# EAGLE board PDU-breakout (EAGLE 9.7.0)
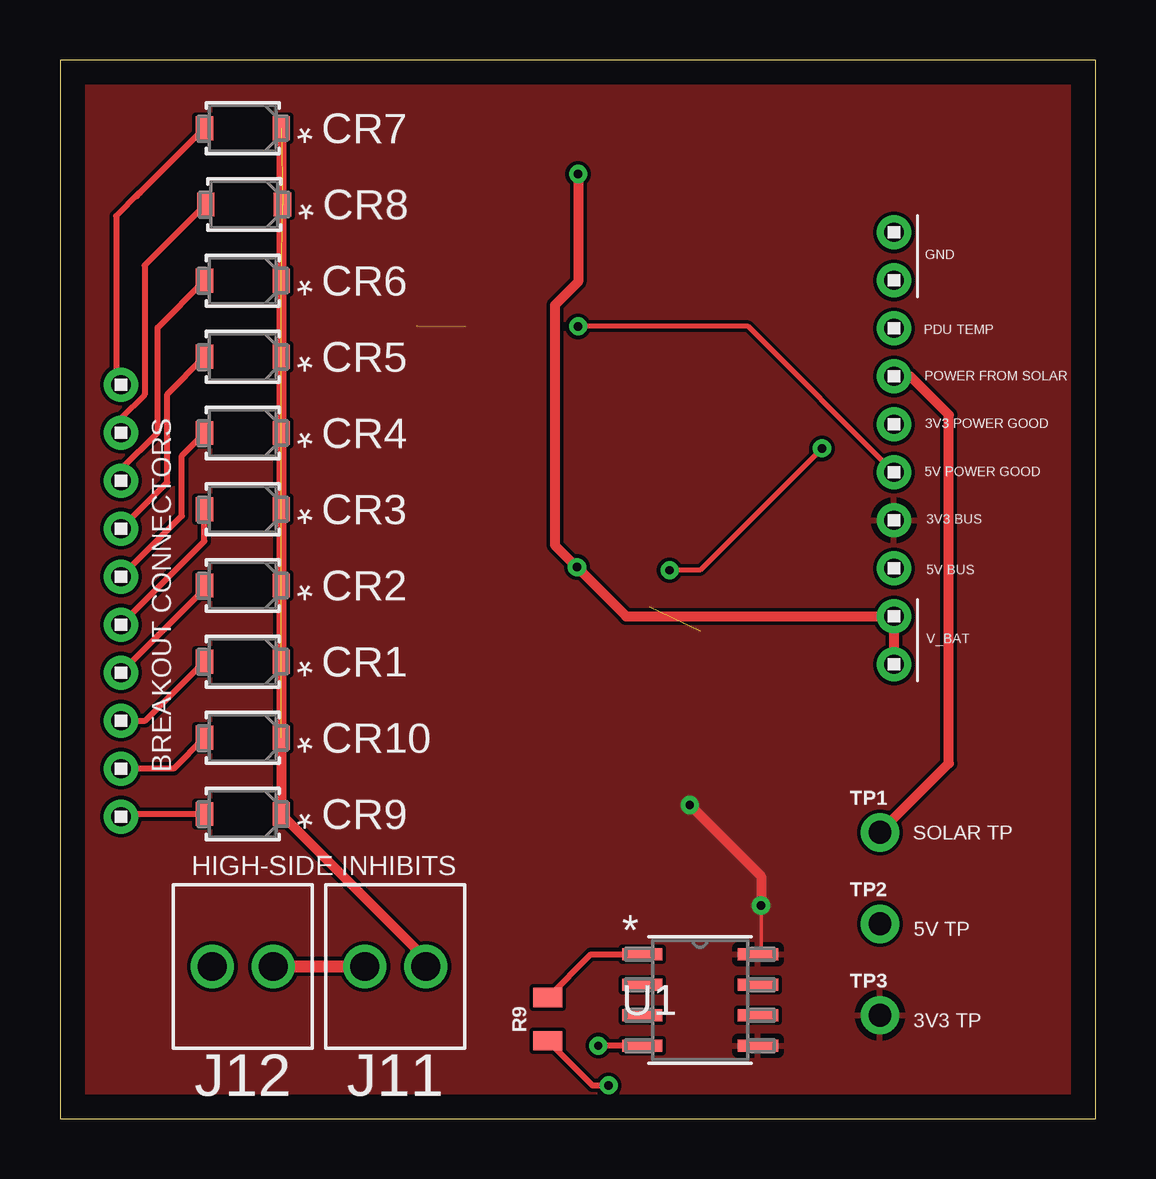
[diagram p0: board, top side]
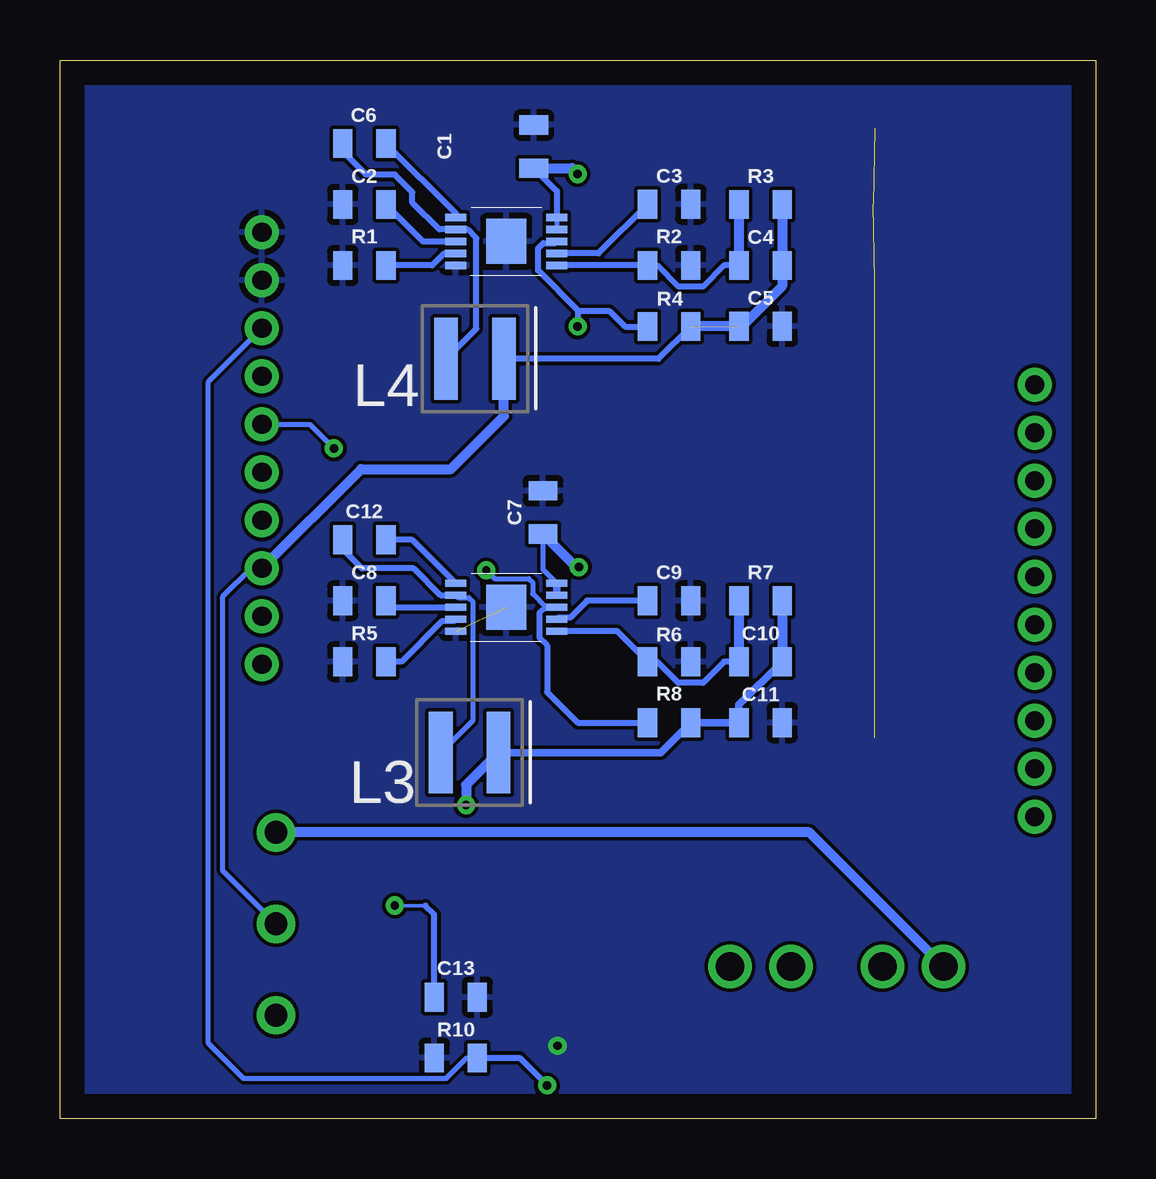
[diagram p1: board, bottom side, seen from below]

Size 43.16 x 44.12 mm. Coordinates in mm from the lower left corner, seen from the top.
Outline: 0,0 43.16,0 43.16,44.12 0,44.12 0,0
Copper layers (1*16): Top 0.035mm / dielectric 1.5mm / Bottom 0.035mm
Design rules "default": minimum track width 6mil, minimum drill 0.35mm, track to track 6mil, track to pad 6mil, pad to pad 6mil, via to via 6mil, smd to smd 6mil, copper to edge 40mil, drill to drill 6mil, minimum pad ring 10mil, minimum via ring 8mil, stop-mask expansion 4mil, vias tented up to drill 0mil, thermal gap 10mil

## Footprints (pad centres in the part's own frame; a part is rotated, then mirrored left to right if it is on the bottom)
0805 = smd 0.8 x 1.2: 1 -0.9,0; 2 0.9,0
CFP3_SOD123W_NEX-L = smd 0.711 x 0.991: 1 -1.6,0; 2 1.6,0
TERMBLK_254-2N = drill 1.2: 1 0,0; 2 2.54,0
XFL4020 = smd 0.98 x 3.4: P$1 1,1.8; P$2 3.4,1.8
1X01_NO_SILK = drill 0.95 pad 1.6: 1 0,0
R_8_ADI-L = smd 1.676 x 0.508: 1 -2.413,1.905; 2 -2.413,0.635; 3 -2.413,-0.635; 4 -2.413,-1.905; 5 2.413,-1.905; 6 2.413,-0.635; 7 2.413,0.635; 8 2.413,1.905
LT8609A-MSE10 = smd 0.889 x 0.3: BST 0,2; EN/UV 4.211,2; FB 4.211,0; INTVCC 0,1; PG 4.211,1; RT 0,0.5; SW 0,1.5; SYNC 0,0; TR/SS 4.211,0.5; VIN 4.211,1.5 | smd 1.68 x 1.88: GND 2.106,1
1X10 = drill 0.8 pad 1.422: 1 -9,0; 2 -7,0; 3 -5,0; 4 -3,0; 5 -1,0; 6 1,0; 7 3,0; 8 5,0; 9 7,0; 10 9,0

## Placement (x,y rotation side)
C1  4.7uF  [0805]  23.42,40.51 90 bottom
C2  1uF  [0805]  30.48,38.1 0 bottom
C3  10nF  [0805]  17.78,38.11 0 bottom
C4  10pF  [0805]  13.97,35.56 0 bottom
C5  22uF  [0805]  13.97,33.02 0 bottom
C6  0.1uF  [0805]  30.48,40.64 180 bottom
C7  4.7uF  [0805]  23.04,25.27 90 bottom
C8  1uF  [0805]  30.48,21.59 0 bottom
C9  10nF  [0805]  17.78,21.59 0 bottom
C10  10pF  [0805]  13.97,19.05 0 bottom
C11  22uF  [0805]  13.97,16.51 0 bottom
C12  0.1uF  [0805]  30.48,24.13 180 bottom
C13  0.1uF  [0805]  26.67,5.07 180 bottom
CR1  PMEG10020ELRXCFP3_SOD123W_NEX-L  [CFP3_SOD123W_NEX-L]  7.62,19.05 180 top
CR2  PMEG10020ELRXCFP3_SOD123W_NEX-L  [CFP3_SOD123W_NEX-L]  7.62,22.23 180 top
CR3  PMEG10020ELRXCFP3_SOD123W_NEX-L  [CFP3_SOD123W_NEX-L]  7.62,25.4 180 top
CR4  PMEG10020ELRXCFP3_SOD123W_NEX-L  [CFP3_SOD123W_NEX-L]  7.62,28.57 180 top
CR5  PMEG10020ELRXCFP3_SOD123W_NEX-L  [CFP3_SOD123W_NEX-L]  7.62,31.75 180 top
CR6  PMEG10020ELRXCFP3_SOD123W_NEX-L  [CFP3_SOD123W_NEX-L]  7.62,34.92 180 top
CR7  PMEG10020ELRXCFP3_SOD123W_NEX-L  [CFP3_SOD123W_NEX-L]  7.62,41.27 180 top
CR8  PMEG10020ELRXCFP3_SOD123W_NEX-L  [CFP3_SOD123W_NEX-L]  7.67,38.1 180 top
CR9  PMEG10020ELRXCFP3_SOD123W_NEX-L  [CFP3_SOD123W_NEX-L]  7.62,12.7 180 top
CR10  PMEG10020ELRXCFP3_SOD123W_NEX-L  [CFP3_SOD123W_NEX-L]  7.62,15.88 180 top
J11  2828XX-2282834-2  [TERMBLK_254-2N]  12.7,6.35 0 top
J12  2828XX-2282834-2  [TERMBLK_254-2N]  6.35,6.35 0 top
L3  2.2uH  [XFL4020]  28.3,13.46 0 bottom
L4  2.2uH  [XFL4020]  28.07,29.87 0 bottom
R1  18.2k  [0805]  30.48,35.56 180 bottom
R2  187k  [0805]  17.78,35.56 180 bottom
R3  1M  [0805]  13.97,38.1 0 bottom
R4  100k  [0805]  17.78,33.01 180 bottom
R5  18.2k  [0805]  30.48,19.05 180 bottom
R6  309k  [0805]  17.78,19.05 180 bottom
R7  1M  [0805]  13.97,21.59 0 bottom
R8  100k  [0805]  17.78,16.51 180 bottom
R9  45.3k  [0805]  20.32,4.16 90 top
R10  10k  [0805]  26.67,2.54 0 bottom
TP1  TEST-POINTPOGO_PTH  [1X01_NO_SILK]  34.16,11.94 0 top
TP2  TEST-POINTPOGO_PTH  [1X01_NO_SILK]  34.16,8.13 0 top
TP3  TEST-POINTPOGO_PTH  [1X01_NO_SILK]  34.16,4.32 0 top
U1  TMP36FSZR_8_ADI-L  [R_8_ADI-L]  26.67,4.95 0 top
U$1  LT8609A-MSOP10  [LT8609A-MSE10]  26.67,35.56 0 bottom
U$2  LT8609A-MSOP10  [LT8609A-MSE10]  26.67,20.32 0 bottom
U$8  1X10  [1X10]  34.75,27.94 90 top
U$9  1X10  [1X10]  2.54,21.59 90 top

## Library data of the parts
C1-C13 = SparkFun-Capacitors; PROD_ID: CAP-11624
CR1-CR10 = PDUv2; BUILT_BY: EMA_Cory; COPYRIGHT: Copyright (C) 2018 Accelerated Designs. All rights reserved; DATASHEET: https://assets.nexperia.com/documents/data-sheet/PMEG10020ELR.pdf; MANUFACTURER_PART_NUMBER: PMEG10020ELRX; SOURCELIBRARY: Nexperia_2020-02-26; VENDOR: Nexperia
J11 J12 = Connector; CATEGORY: Fixed Terminal Blocks; DESCRIPTION: Fixed Terminal Blocks 2P SIDE ENTRY 2.54mm; MANUFACTURER: TE Connectivity AMP Connectors; MPN: 282834-2; OPERATING_TEMPERATURE: -40°C ~ 105°C; PART_STATUS: Active; PITCH: 0.100" (2.54mm); ROHS_COMPLIANCE: RoHS Compliant; SERIES: Buchanan; SUBCATEGORY: Terminal Blocks; TYPE: Through Hole; Screw - Rising Cage Clamp; Side wire entry, Horizontal with Board
L3 L4 = SparkFun-Coils; PROD_ID: INDUC-13855
R1-R10 = SparkFun-Resistors; PROD_ID: RES-08474
TP1-TP3 = SparkFun-Connectors
U1 = PDUv2; COPYRIGHT: Copyright (C) 2021 Ultra Librarian. All rights reserved.; MANUFACTURER_PART_NUMBER: TMP36FSZ; MFR_NAME: Analog Devices Inc
U$1 U$2 = LT8609A
U$8 U$9 = headers(2mm)

## Nets
3V3_BUS: C10.2 C11.1 C13.2 L3.P$2 R7.2 R8.1 TP3.1 U1.5 U1.8 U$8.4
3V3_POWER_GOOD: R8.2 U$2.PG U$8.6
5V_BUS: C4.2 C5.1 L4.P$2 R3.2 R4.1 TP2.1 U$8.3
5V_POWER_GOOD: R4.2 U$1.PG U$8.5
5V_USB_CHARGE: CR7.2 U$9.10
GND: C1.2 C2.1 C3.2 C5.2 C7.2 C8.1 C9.2 C11.2 C13.1 R1.2 R2.1 R5.2 R6.1 R10.1 U1.4 U$1.GND U$1.SYNC U$2.GND U$2.SYNC U$8.9 U$8.10
N$1: C6.1 U$1.BST
N$2: C2.2 U$1.INTVCC
N$3: C3.1 U$1.TR/SS
N$4: R1.1 U$1.RT
N$5: C8.2 U$2.INTVCC
N$6: C4.1 R2.2 R3.1 U$1.FB
N$7: C6.2 L4.P$1 U$1.SW
N$8: C9.1 U$2.TR/SS
N$9: R5.1 U$2.RT
N$10: C10.1 R6.2 R7.1 U$2.FB
N$11: C12.1 U$2.BST
N$12: R9.2 U1.1
N$13: C12.2 L3.P$1 U$2.SW
N$15: J11.1 J12.2
POWER_FROM_SOLAR: J12.1 TP1.1 U$8.7
POWER_IN_PRE_INH: CR1.1 CR2.1 CR3.1 CR4.1 CR5.1 CR6.1 CR7.1 CR8.1 CR9.1 CR10.1 J11.2
SOLAR_IN1: CR9.2 U$9.1
SOLAR_IN2: CR10.2 U$9.2
SOLAR_IN3: CR1.2 U$9.3
SOLAR_IN4: CR2.2 U$9.4
SOLAR_IN5: CR3.2 U$9.5
SOLAR_IN6: CR4.2 U$9.6
SOLAR_IN7: CR5.2 U$9.7
SOLAR_IN8: CR6.2 U$9.8
SOLAR_IN9: CR8.2 U$9.9
TEMP_PDU: R9.1 R10.2 U$8.8
V_BAT: C1.1 C7.1 U$1.EN/UV U$1.VIN U$2.EN/UV U$2.VIN U$8.1 U$8.2

## Tracks (layer width: path | path; a pad name or v marks a point on that pad's centre or on a via)
3V3_BUS  (via drill 0.35)
  Top 0.152: v29.21,8.89 29.21,6.99 U1.8
  Top 0.406: v26.24,13.08 29.21,10.11 v29.21,8.89
  Bottom 0.152: 27.94,8.89 v29.21,8.89
  Bottom 0.254: C13.2 27.57,8.52 27.94,8.89
  Bottom 0.305: L3.P$2 18.13,15.26 R8.1 C11.1 14.87,17.25 C10.2
  Bottom 0.406: R7.2 C10.2 | L3.P$2 26.24,13.92 v26.24,13.08
  pour Top: 0.08,0.08 43.18,0.08 43.18,44.12 0.08,44.12
3V3_POWER_GOOD  (via drill 0.35)
  Top 0.203: v31.75,27.94 26.67,22.86 v25.4,22.86
  Bottom 0.203: U$8.6 32.75,28.94 v31.75,27.94 | v25.4,22.86 25.05,22.51 23.62,22.51 23.47,22.36 23.47,21.88 22.91,21.32 U$2.PG
  Bottom 0.254: U$2.PG 22.48,21.3 22.97,21.3 23.18,21.09 23.18,20.05 22.86,19.73 22.86,17.78 21.59,16.51 R8.2
5V_BUS  (1 unrouted)
  Bottom 0.2: TP2.1 36.37,10.34 36.37,21.77 35.2,22.94 U$8.3
  Bottom 0.254: R4.1 18.22,31.67 L4.P$2
  Bottom 0.406: R3.2 C4.2 13.07,34.69 14.74,33.02 R4.1 | U$8.3 30.61,27.08 26.87,27.08 24.67,29.28 L4.P$2
5V_POWER_GOOD  (via drill 0.35)
  Top 0.203: v21.59,33.02 28.67,33.02 U$8.5
  Bottom 0.254: U$1.PG 22.53,36.49 23.02,36.49 23.24,36.27 23.24,35.35 21.54,33.65 | R4.2 19.61,33.01 20.25,33.65 21.54,33.65 | v21.59,33.02 v21.58,33.01 21.58,33.6 21.54,33.65
5V_USB_CHARGE
  Top 0.254: CR7.2 3.33,38.58 | 3.17,38.43 3.33,38.58 | 3.33,38.58 3.3,38.58 2.34,37.62 2.34,30.79 U$9.10
GND  (via drill 0.35)  (1 unrouted)
  Top 0.254: U1.4 v22.43,3.05
  pour Bottom: 0.08,0.08 43.18,0.08 43.18,43.92 0.08,43.92
N$1
  Bottom 0.254: U$1.BST 26.67,37.73 C6.1
N$2
  Bottom 0.254: U$1.INTVCC 28.04,36.56 C2.2
N$3
  Bottom 0.254: U$1.TR/SS 20.73,36.06 C3.1
N$4
  Bottom 0.254: R1.1 27.66,35.56 27.16,36.06 U$1.RT
N$5
  Bottom 0.254: U$2.INTVCC 29.31,21.32 C8.2
N$6
  Bottom 0.254: R3.1 14.87,38.26 | U$1.FB R2.2 18.27,35.56 17.4,34.68 16.36,34.68 15.48,35.56 C4.1
  Bottom 0.406: R3.1 C4.1
N$7
  Bottom 0.254: C6.2 31.37,40.31 30.4,39.34 29.21,39.34 28.47,38.61 28.47,38.18 27.36,37.06 27.35,37.06 U$1.SW 26.18,37.06 25.81,36.69 25.81,32.93 L4.P$1
N$8
  Bottom 0.254: U$2.TR/SS 22.39,20.89 21.9,20.89 21.2,21.59 C9.1
N$9
  Bottom 0.254: U$2.RT 26.74,20.75 27.23,20.75 28.93,19.05 R5.1
N$10
  Bottom 0.254: C10.1 15.48,19.05 16.36,18.17 17.4,18.17 18.27,19.05 R6.2 19.95,20.32 U$2.FB
  Bottom 0.406: R7.1 C10.1
N$11
  Bottom 0.254: U$2.BST 28.48,24.13 C12.1
N$12
  Top 0.254: R9.2 22.12,6.86 U1.1
N$13
  Bottom 0.203: U$2.SW 26.57,21.72 26.12,21.72 25.97,21.57 25.97,16.59 L3.P$1
  Bottom 0.254: U$2.SW 27.31,21.82 28.42,22.94 30.58,22.94 31.38,23.73 C12.2
N$15
  Top 0.508: J12.2 J11.1
POWER_FROM_SOLAR
  Top 0.406: TP1.1 37.03,14.81 37.03,29.34 35.43,30.94 U$8.7
  Bottom 0.406: J12.1 11.94,11.94 TP1.1
POWER_IN_PRE_INH  (8 unrouted)
  Top 0.406: CR7.1 CR9.1 15.24,6.68 J11.2
SOLAR_IN1
  Top 0.254: U$9.1 2.54,12.7 CR9.2
SOLAR_IN2
  Top 0.254: U$9.2 4.74,14.59 CR10.2
SOLAR_IN3
  Top 0.254: U$9.3 3.56,16.59 CR1.2
SOLAR_IN4
  Top 0.254: U$9.4 6.02,22.07 CR2.2
SOLAR_IN5
  Top 0.254: U$9.5 6.02,24.07 CR3.2
SOLAR_IN6
  Top 0.254: U$9.6 5.08,25.13 5.08,27.64 CR4.2
SOLAR_IN7
  Top 0.254: CR5.2 4.47,30.2 4.47,26.52 U$9.7
SOLAR_IN8
  Top 0.254: 2.54,27.19 U$9.8 2.54,27.06 4.06,28.59 4.06,32.97 CR6.2
SOLAR_IN9
  Top 0.254: U$9.9 2.54,29.19 3.53,30.18 3.53,35.56 CR8.2
TEMP_PDU  (via drill 0.35)
  Top 0.254: R9.1 22.18,1.39 v22.86,1.39
  Bottom 0.2: R10.2 26.21,2.54 27.07,1.69 35.52,1.69 36.98,3.15 36.98,30.7 U$8.8
  Bottom 0.254: v22.86,1.39 24.01,2.54 R10.2
V_BAT  (via drill 0.35)
  Top 0.406: U$8.1 U$8.2 23.59,20.94 21.63,22.9 v21.54,22.99 20.62,23.9 20.62,33.91 21.59,34.87 v21.59,39.37
  Bottom 0.203: U$1.EN/UV U$1.VIN | C7.1 23.04,22.9 U$2.EN/UV
  Bottom 0.254: C1.1 22.46,38.65 U$1.EN/UV
  Bottom 0.305: U$2.EN/UV U$2.VIN
  Bottom 0.406: C7.1 21.65,22.99 v21.54,22.99 | C1.1 21.83,39.61 v21.59,39.37

## Text on the board
tPlace: BREAKOUT CONNECTORS | HIGH-SIDE INHIBITS
tNames: GND | PDU TEMP | POWER FROM SOLAR | 3V3 POWER GOOD | 5V POWER GOOD | 3V3 BUS | 5V BUS | V_BAT | SOLAR TP | 5V TP | 3V3 TP